# Altium PCB ResistorBoard.PcbDoc
Units mil, origin at the board's own origin, x right, y up, seen from the top; angles counter-clockwise.
Board outline 13125 x 8350 mil, 2 copper layers (Top Layer, Bottom Layer); 1 components, 0 nets, 161 pads, 0 vias.
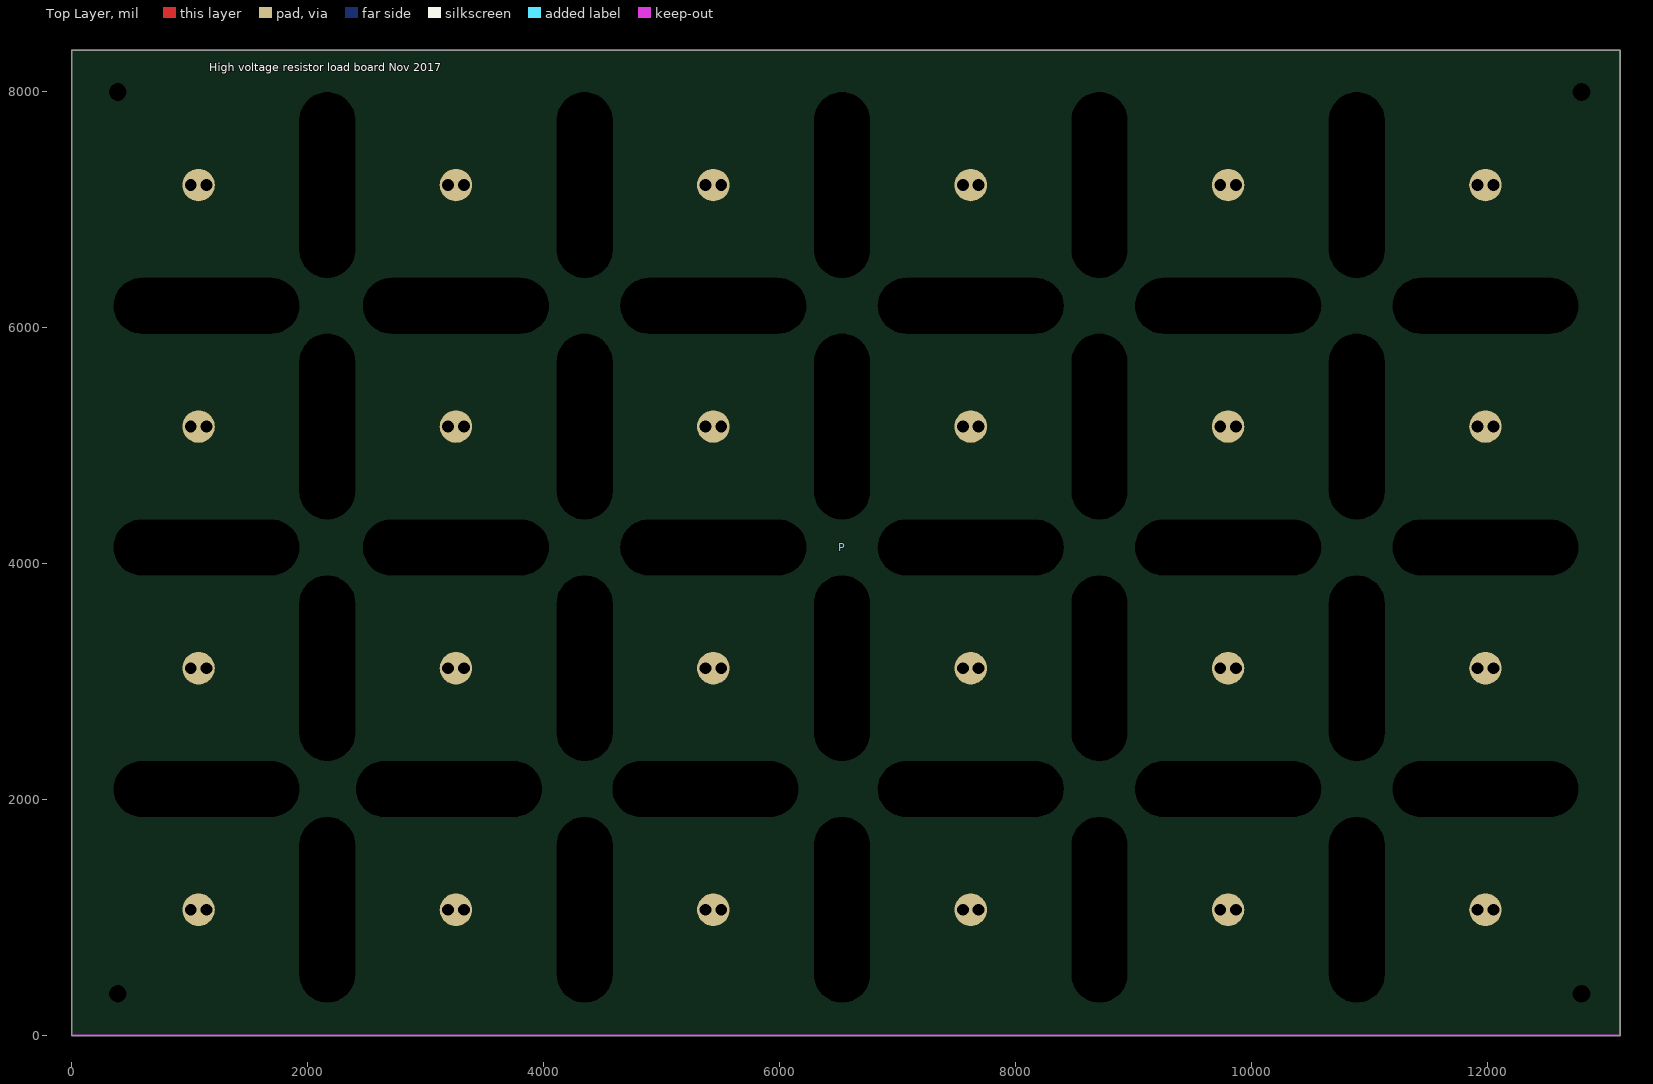
[diagram p0: Top Layer view]
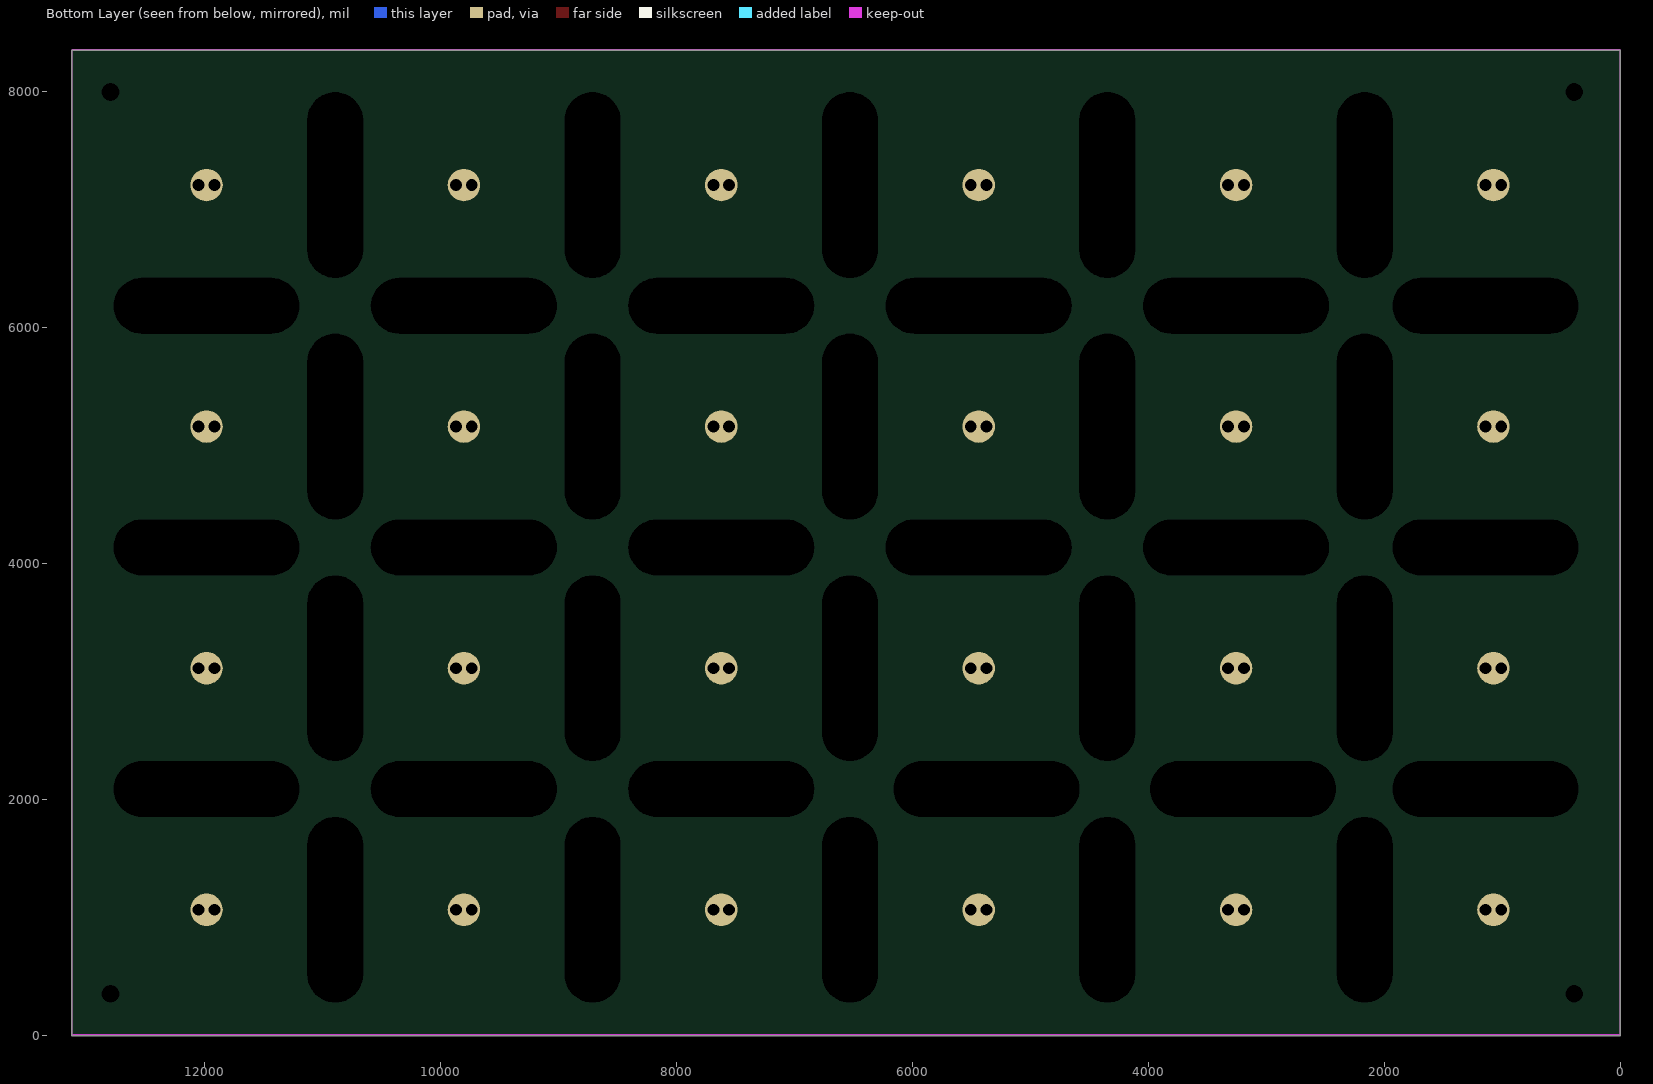
[diagram p1: Bottom Layer view, seen from below]

## Layer stack, top to bottom
Top Solder: solder mask 0.4, Solder Resist, Dk 3.5
Top Layer: signal copper 1.4
Dielectric 1: dielectric 12.6, FR-4, Dk 4.8
Bottom Layer: signal copper 1.4
Bottom Solder: solder mask 0.4, Solder Resist, Dk 3.5

## Board outline
0,0 0,8350 13125,8350 13125,0

## Design rules (kind name [scope] priority, off if disabled: settings)
Clearance [All] p1: gap=10
HoleSize [All] p1: absolutevalues=TRUE maxlimit=250 minlimit=1 maxpercent=80.000 minpercent=20.000
PolygonConnect [All] p1: connectstyle=Relief reliefconductorwidth=10 reliefentries=4 polygonreliefangle="90 Angle" airgapwidth=10
RoutingVias [All] p1: holewidth=28 width=50 viastyle="Through Hole" minholewidth=28 minwidth=50 maxholewidth=28 maxwidth=50
SolderMaskExpansion [All] p1: expansion=4
Width [All] p1: maxlimit=10 minlimit=10 preferedwidth=10
29 further rules are at their usual default settings.

## Components (designator, comment, footprint, x,y, rotation, side; value= is the part's Value field where it differs from the comment)
P "MicroJack" "MicroJack_1682 - 24 times" 11981.65,7207.24 r180 top

## Footprints (in the part's own frame and the unit in brackets; to place one, negate y for a bottom-side part, rotate by r counter-clockwise, add the part's x,y. Pads: shape width x height; smd on the part's side, far side on the other; paste and mask are expansions set on the pad)
"MicroJack_1682 - 24 times" [mm]
  round 3.5 hole 2.55: 1(-1.7,156) 1(-1.7,104) 1(-1.7,52) 1(-1.7,0) 1(-1.7,0) 1(1.7,156) 1(1.7,104) 1(1.7,52) 1(1.7,0) 1(1.7,0) 1(53.7,156) 1(53.7,52) 1(53.7,104) 1(53.7,0) 1(53.7,0) 1(57.1,156) 1(57.1,52) 1(57.1,104) 1(57.1,0) 1(57.1,0) 1(109.1,104) 1(109.1,156) 1(109.1,0) 1(109.1,0) 1(109.1,52) 1(112.5,104) 1(112.5,156) 1(112.5,0) 1(112.5,0) 1(112.5,52) 1(164.5,104) 1(164.5,156) 1(164.5,0) 1(164.5,0) 1(164.5,52) 1(167.9,104) 1(167.9,156) 1(167.9,0) 1(167.9,0) 1(167.9,52) 1(219.9,0) 1(219.9,0) 1(219.9,52) 1(219.9,104) 1(219.9,156) 1(223.3,0) 1(223.3,0) 1(223.3,52) 1(223.3,104) 1(223.3,156) 1(275.3,0) 1(275.3,0) 1(275.3,52) 1(275.3,104) 1(275.3,156) 1(278.7,0) 1(278.7,0) 1(278.7,52) 1(278.7,104) 1(278.7,156)
  round 7 smd: 1(0,156) 1(0,104) 1(0,52) 1(0,0) 1(0,0) 1(55.4,156) 1(55.4,52) 1(55.4,104) 1(55.4,0) 1(55.4,0) 1(55.4,0) 1(110.8,104) 1(110.8,156) 1(110.8,0) 1(110.8,0) 1(110.8,0) 1(110.8,52) 1(166.2,104) 1(166.2,156) 1(166.2,0) 1(166.2,0) 1(166.2,0) 1(166.2,52) 1(221.6,0) 1(221.6,0) 1(221.6,0) 1(221.6,52) 1(221.6,104) 1(221.6,156) 1(277,0) 1(277,0) 1(277,0) 1(277,52) 1(277,104) 1(277,156)
  round 7 smd far side: 1(0,156) 1(0,104) 1(0,52) 1(0,0) 1(55.4,156) 1(55.4,52) 1(55.4,104) 1(55.4,0) 1(110.8,104) 1(110.8,156) 1(110.8,0) 1(110.8,52) 1(166.2,104) 1(166.2,156) 1(166.2,0) 1(166.2,52) 1(221.6,0) 1(221.6,52) 1(221.6,104) 1(221.6,156) 1(277,0) 1(277,52) 1(277,104) 1(277,156)
  round 0 hole 12 slot 40 at 0 deg unplated: 1(0,130) 1(0,78) 1(0,26) 1(55.4,130) 1(55.4,78) 1(55.4,26) 1(110.8,130) 1(110.8,26) 1(110.8,78) 1(166.2,26) 1(166.2,78) 1(167.9,130) 1(221.6,26) 1(221.6,78) 1(223.1,130) 1(275.3,26) 1(275.3,78) 1(275.3,130)
  round 0 hole 12 slot 40 at 90 deg unplated: 1(27.7,156) 1(27.7,104) 1(27.7,52) 1(27.7,0) 1(83.1,156) 1(83.1,52) 1(83.1,104) 1(83.1,0) 1(138.5,104) 1(138.5,156) 1(138.5,0) 1(138.5,52) 1(193.9,104) 1(193.9,156) 1(193.9,0) 1(193.9,52) 1(249.3,0) 1(249.3,52) 1(249.3,104) 1(249.3,156)
  body extent -3.25,-1.55 280.24,157.51, height 4

## Free pads (board coordinates)
  round 0 hole 150 unplated paste+0 mask+0: 0(390,355) 0(390,7995) 0(12795,7995)
  round 60 hole 150 unplated paste+0 mask+0: 0(12795,355)

## Nets (pads, with @x,y where several pads share a name; then routed paths per layer and width w, separated by ;. In a path a pad name is that pad's centre, name@x,y a point inside that pad or via, vN(x,y) a via of type N, cw(c..) or ccw(c..) an arc to the next point about the centre after c; other vN are vias at no path point)
pads on no net: P.1

## Keep-outs
Keep-Out Layer:
  lines w10: 0,5 13120,5 13120,8355 0,8355 0,5

## Silkscreen, mask and mechanical layers (free items; w line width, h text height)
Top Overlay:
  text "High voltage resistor load board Nov 2017" at 1165,8145 h118.11
Drill Drawing:
  text ".Legend" at 400,650 h118.11